# Altium PCB PE.PcbDoc
Units mm, origin at the board's own origin, x right, y up, seen from the top; angles counter-clockwise.
Board outline 60.83 x 52.32 mm, 2 copper layers (Top Layer, Bottom Layer); 18 components, 14 nets, 52 pads, 0 vias.
Unrouted connection lines stored in the file: 1.
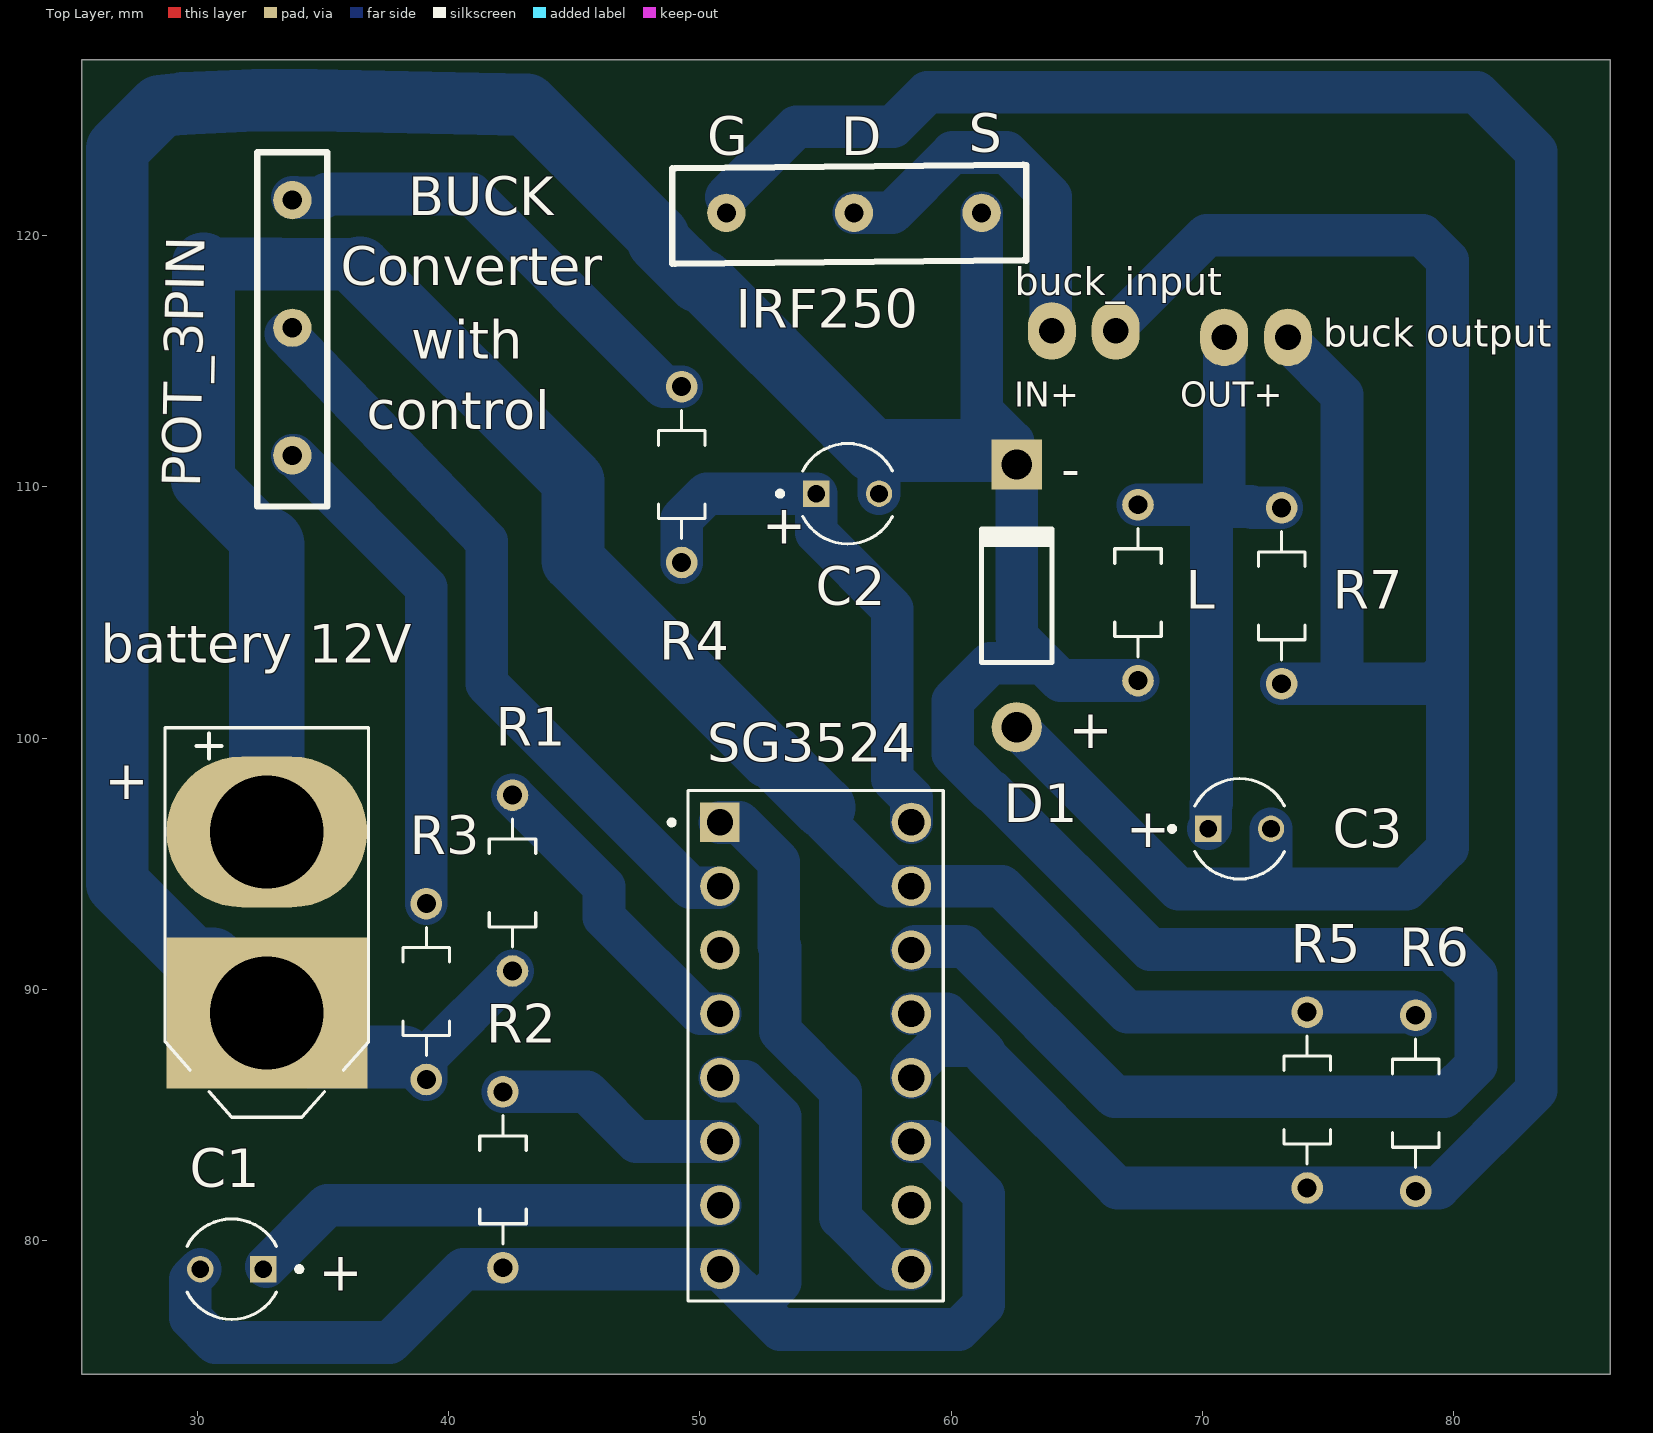
[diagram p0: Top Layer view]
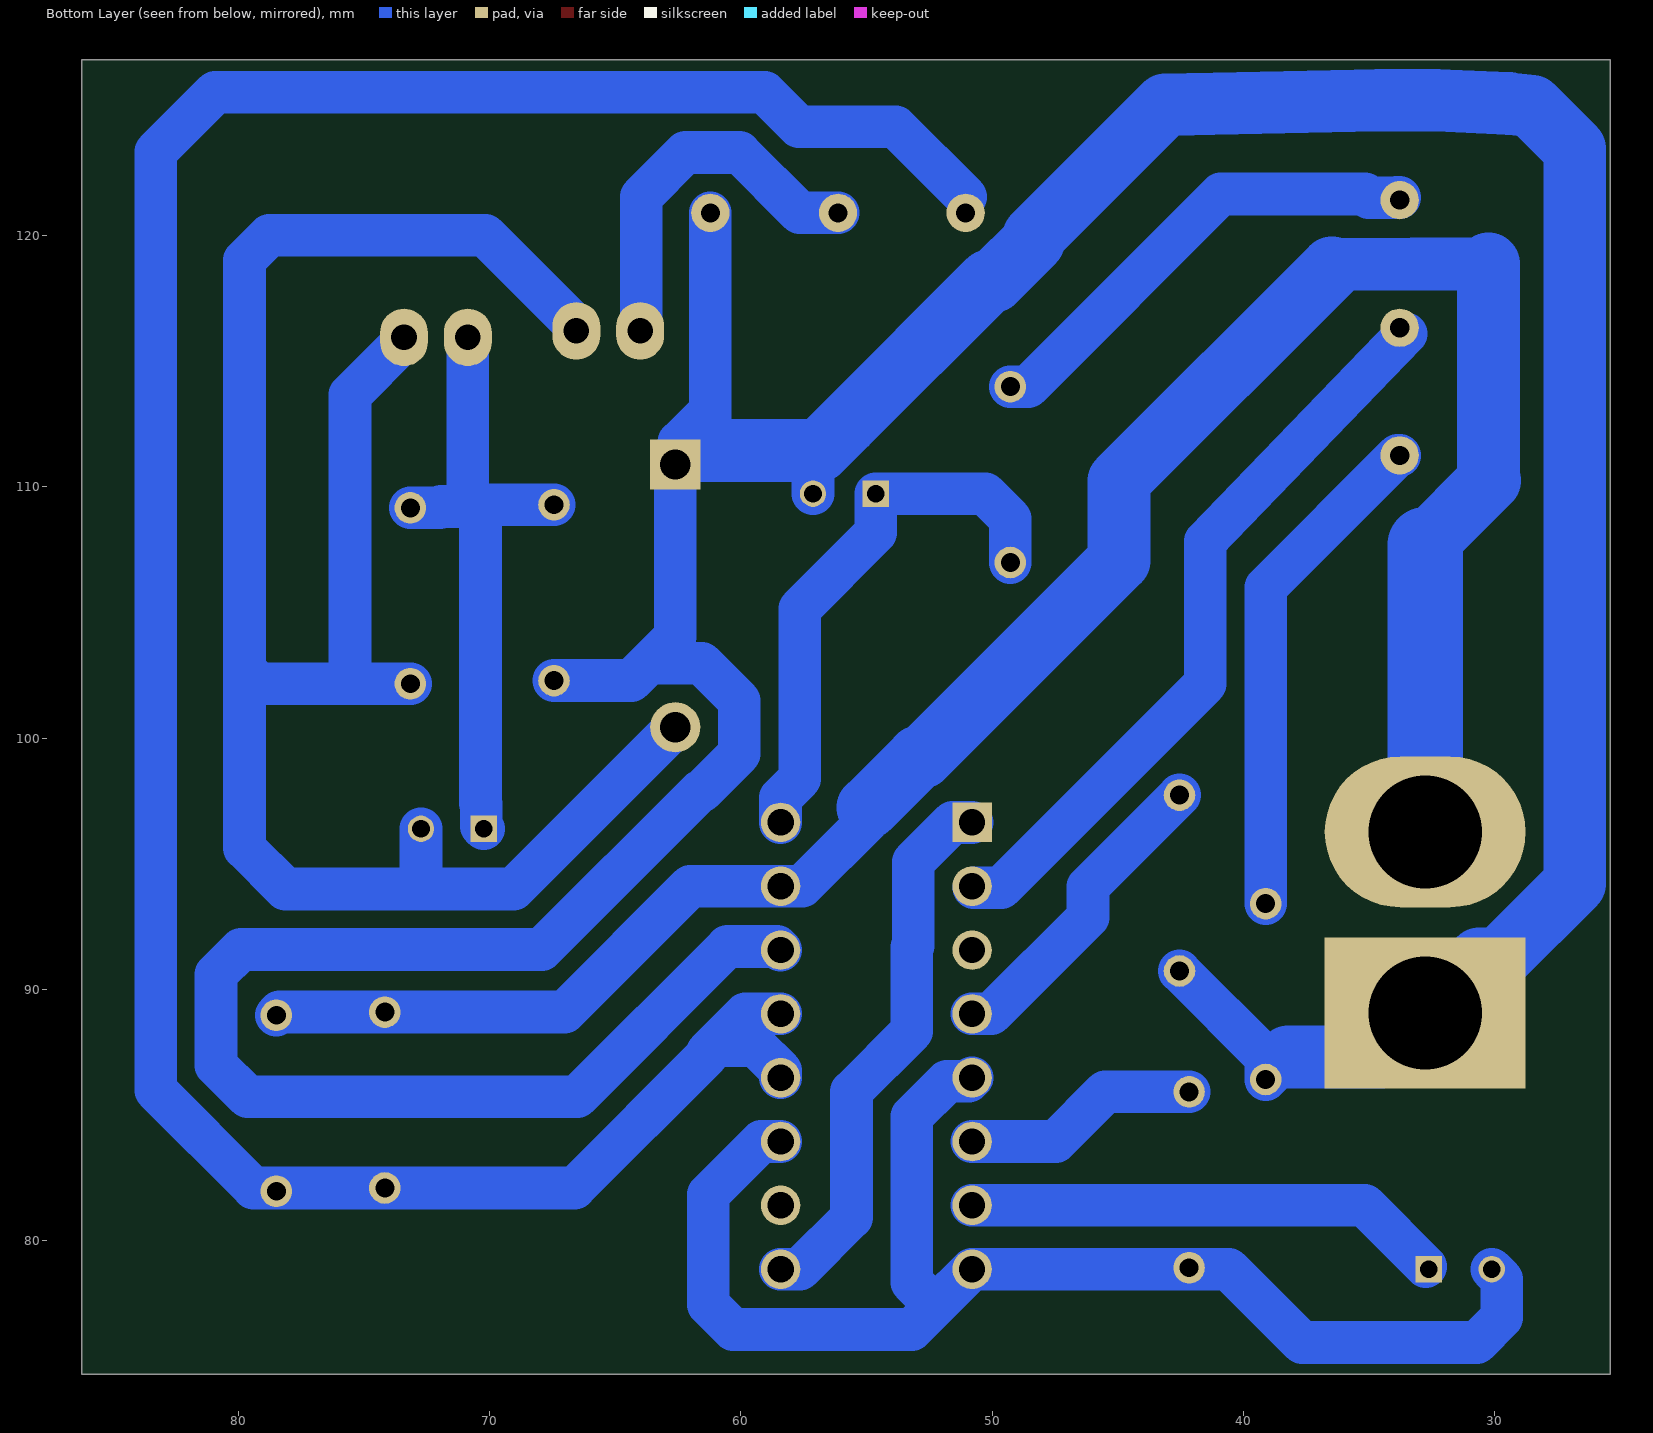
[diagram p1: Bottom Layer view, seen from below]
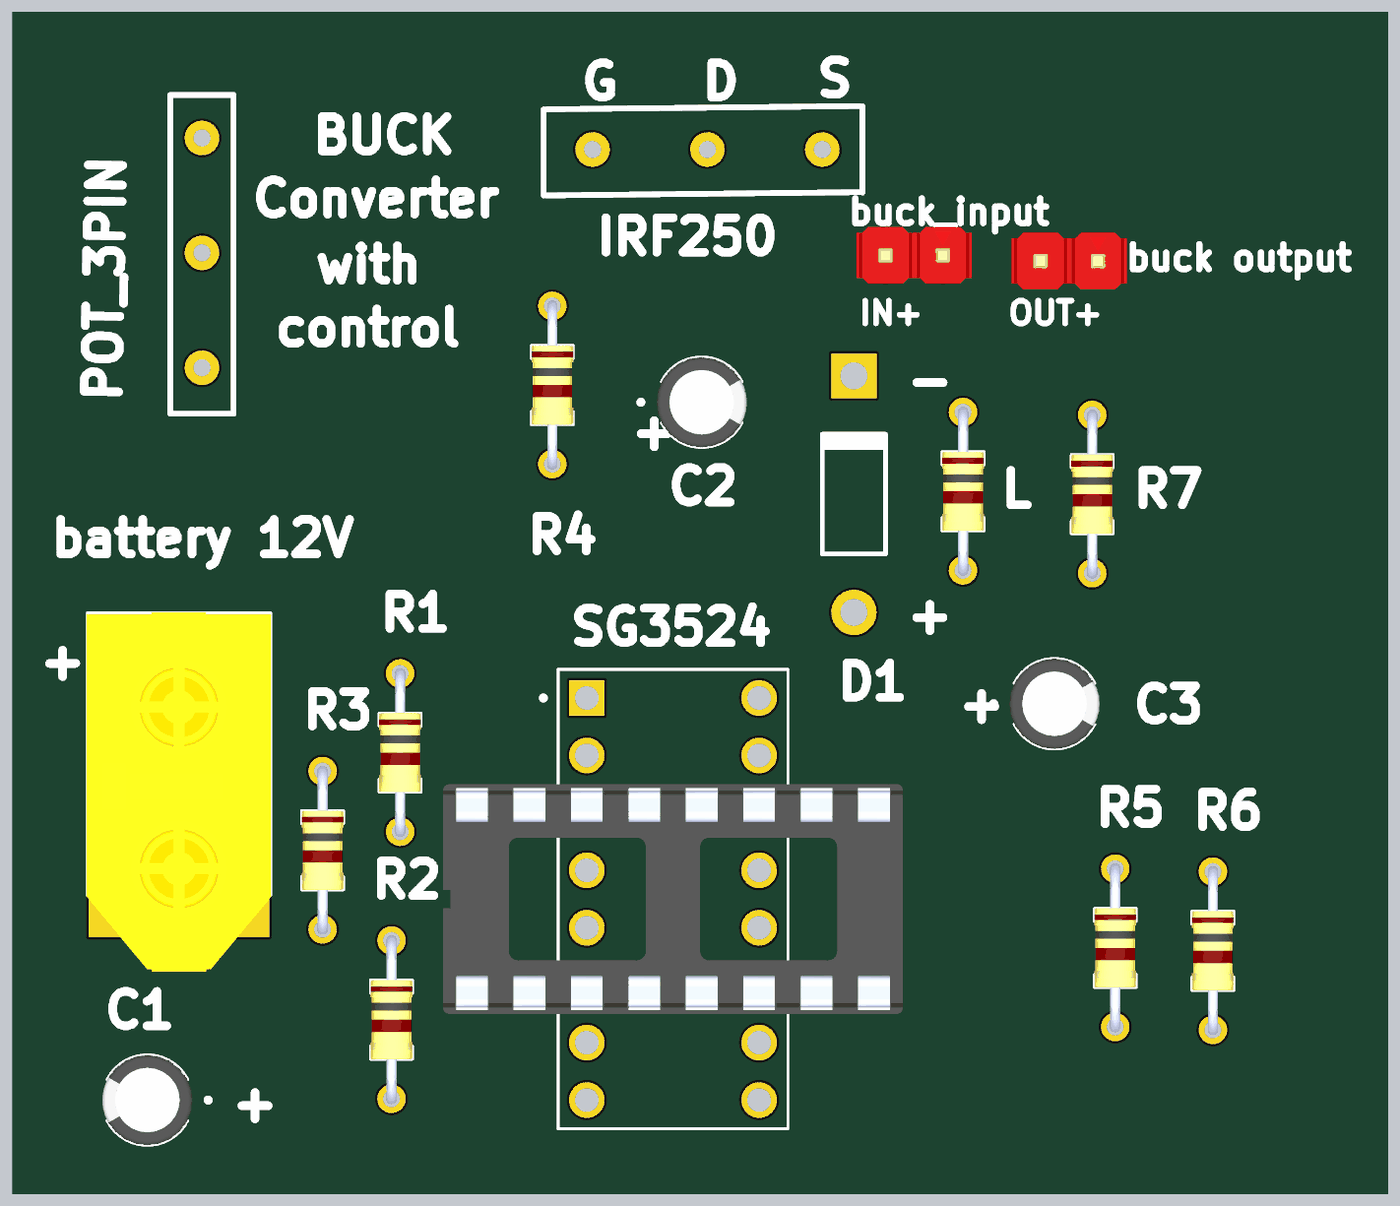
[diagram p2: 3D render of the assembled board from above, using the file's embedded part models]

## Layer stack, top to bottom
Top Solder: solder mask 0.0102, Solder Resist, Dk 3.5
Top Layer: signal copper 0.0356
Dielectric 1: dielectric 0.32, FR-4, Dk 4.8
Bottom Layer: signal copper 0.0356
Bottom Solder: solder mask 0.0102, Solder Resist, Dk 3.5

## Board outline
25.4,74.676 86.233,74.676 86.233,127 25.4,127

## Design rules (kind name [scope] priority, off if disabled: settings)
Clearance [All] p1: gap=0.9 ignorepadtopadclearanceinfootprint=TRUE except(0.7: Arc-Arc Arc-Track Arc-SMDPad Arc-THPad Arc-Via Track-Track Track-SMDPad Track-THPad Track-Via SMDPad-SMDPad SMDPad-THPad SMDPad-Via THPad-THPad THPad-Via Via-Via)
PolygonConnect [All] p1: connectstyle=Relief reliefconductorwidth=0.254 reliefentries=4 polygonreliefangle="90 Angle" airgapwidth=0.254
RoomDefinition PE [InComponentClass('PE')] p1: confinementstyle=ConfineIn formatcopy=TRUE lockcomponents=FALSE outline 0,25.693 186.964,25.693 186.964,163.576 0,163.576
RoutingVias [All] p1: holewidth=0.711 width=1.27 viastyle="Through Hole" minholewidth=0.711 minwidth=1.27 maxholewidth=0.711 maxwidth=1.27
SolderMaskExpansion [All] p1: expansion=0.102 istentingtop=FALSE
Width [All] p1: maxlimit=3 minlimit=1.5 preferedwidth=1.7 toplayer_maxwidth=1.7 bottomlayer_minwidth=1.7 minimp=50.000000 maximp=50.000000 favimp=50.000000
30 further rules are at their usual default settings.

## Components (designator, comment, footprint, x,y, rotation, side; value= is the part's Value field where it differs from the comment)
"battery 12V" "HEADER, 2 PINS" "XT60 MALE" 32.766,89.066 r90 top (schematic designator "Control_circuit battery input 12V")
"buck output" "2PIN" pin2 73.406,115.951 r90 top
buck_input "2PIN" pin2 66.548,116.205 r90 top
C1 "0.1uF cap" "4.7UF CAP" 31.369,78.867 r180 top
C2 "0.1uF cap" "4.7UF CAP" 55.88,109.728 r0 top
C3 "47uF cap" "4.7UF CAP" 71.481,96.393 r0 top
D1 "Diode 1N4934" DO-41 62.611,105.664 r90 top
IRF250 "Component_1" mosfetIRF250 51.054,120.904 r0 top (schematic designator MOSFERIRF250)
L "INDUCTOR" RESAD700W45L350D185 67.437,105.791 r90 top
POT_3PIN "POT_3PIN" pot_3pin 33.782,111.252 r90 top
R1 "1K" RESAD700W45L350D185 42.545,94.234 r90 top
R2 "2K" RESAD700W45L350D185 42.164,82.423 r90 top
R3 "4.7K" RESAD700W45L350D185 39.116,89.916 r90 top
R4 "4.7K" RESAD700W45L350D185 49.276,110.49 r90 top
R5 "6.8K" RESAD700W45L350D185 74.168,85.598 r90 top
R6 "6.8K" RESAD700W45L350D185 78.486,85.471 r90 top
R7 "220" RESAD700W45L350D185 73.152,105.664 r90 top
SG3524 "IC_BASE16PIN" AMPHENOL_DILB16P-223TLF 54.61,87.757 r0 top

## Footprints (in the part's own frame and the unit in brackets; to place one, negate y for a bottom-side part, rotate by r counter-clockwise, add the part's x,y. Pads: shape width x height; smd on the part's side, far side on the other; paste and mask are expansions set on the pad)
"4.7UF CAP" [mm]
  round 1.05 hole 0.7: N(1.25,0)
  rect 1.05x1.05 hole 0.7: P(-1.25,0)
  silkscreen extent -2.79,-2 1.78,2, body extent -2,-2 2,2, height 7
AMPHENOL_DILB16P-223TLF [mm]
  rect 1.575x1.575 hole 1.05: 01(-3.81,8.89)
  round 1.575 hole 1.05: 02(-3.81,6.35) 03(-3.81,3.81) 04(-3.81,1.27) 05(-3.81,-1.27) 06(-3.81,-3.81) 07(-3.81,-6.35) 08(-3.81,-8.89) 09(3.81,-8.89) 10(3.81,-6.35) 11(3.81,-3.81) 12(3.81,-1.27) 13(3.81,1.27) 14(3.81,3.81) 15(3.81,6.35) 16(3.81,8.89)
  silkscreen extent -5.83,-10.16 5.08,10.16, body extent -10.16,-5.08 10.16,5.08, height 5.25
DO-41 [mm] "Diode, Axial; Body 5.2 x 2.7 mm (LxDia. max), Lead Dia. 0.86 mm (max)"
  round 2 hole 1.2: 1(-5.23,0)
  rect 2x2 hole 1.2: 2(5.23,0)
  silkscreen extent -2.65,-1.41 2.75,1.4
mosfetIRF250 [mil]
  round 60 hole 30: 1(0,0) 2(200,0) 3(400,0)
  silkscreen extent -85,-80 470,76
pin2 [mil]
  oval 90x75 hole 40: 1(0,100) 2(0,0)
  body extent -48,-50 50,150, height 337
pot_3pin [mil]
  round 60 hole 30: 1(0,0) 2(200,0) 3(400,0)
  silkscreen extent -80,-55 475,55
RESAD700W45L350D185 [mm]
  round 1.258 hole 0.75: 1(-3.5,0) 2(3.5,0)
  silkscreen extent -2.55,-0.92 2.55,0.92, body extent -3.72,-0.92 3.72,0.92, height 1.85
"XT60 MALE" [mm]
  rect 6x8 hole 4.5: 1(0,0)
  oval 6x8 hole 4.5: 2(7.2,0)
  silkscreen extent -4.15,-4.05 11.35,4.05, body extent -4.52,-4.08 11.38,4.07, height 16.5

## Part data
"battery 12V": library part "XT60 MALE", "CONNECTOR"
C1 C2 C3: library part "4.7uF cap", "CAP ALUM 4.7UF 20% 50V RADIAL", Package="RADIAL-2 Panasonic", Availability="In Stock", Check_prices=https://www.snapeda.com/parts/ECE-A1HKA4R7I/Panasonic/view-part/2342017/?ref=eda, MF=Panasonic, MP=ECE-A1HKA4R7I, Price=None, Purchase-URL=https://pricing.snapeda.com/search/part/ECE-A1HKA4R7I/?ref=eda, SnapEDA_Link=https://www.snapeda.com/parts/ECE-A1HKA4R7I/Panasonic/view-part/2342017/?ref=snap
D1: "1 Amp Fast Recovery Rectifier", Code_JEDEC=DO-204-AL, ComponentLink1Description="Manufacturer Link", ComponentLink1URL=http://www.fairchildsemi.com/, ComponentLink2Description=Datasheet, ComponentLink2URL=http://www.fairchildsemi.com/ds/1N%2F1N4934.pdf, DatasheetVersion=1999, LatestRevisionDate=17-Jul-2002, LatestRevisionNote="Re-released for DXP Platform.", PackageDescription="Diode, Axial; Body 5.2 x 2.7 mm (LxDia. max), Lead Dia. 0.86 mm (max)", PackageReference=DO-41, PackageVersion=Aug-1999, Published=8-Jun-2000, Publisher="Altium Limited"
L R1 R2 R3 R4 R5 R6 R7: library part 3-1623927-1, "1 MOhms Â±5% 0.25W, 1/4W Through Hole Resistor Axial - Carbon Film", Package=None, Availability="In Stock", Check_prices=https://www.snapeda.com/parts/3-1623927-1/TE+Connectivity/view-part/?ref=eda, MF="TE Connectivity", MP=3-1623927-1, Price=None, SnapEDA_Link=https://www.snapeda.com/parts/3-1623927-1/TE+Connectivity/view-part/?ref=snap
SG3524: "DIP Socket, Stamped and Formed", Package=None, Availability="In Stock", Check_prices=https://www.snapeda.com/parts/DILB16P-223TLF/Amphenol+FCI/view-part/?ref=eda, MF="Amphenol ICC (FCI)", MP=DILB16P-223TLF, Price=None, SnapEDA_Link=https://www.snapeda.com/parts/DILB16P-223TLF/Amphenol+FCI/view-part/?ref=snap

## Nets (pads, with @x,y where several pads share a name; then routed paths per layer and width w, separated by ;. In a path a pad name is that pad's centre, name@x,y a point inside that pad or via, vN(x,y) a via of type N, cw(c..) or ccw(c..) an arc to the next point about the centre after c; other vN are vias at no path point)
"16th pin": C2.P R4.1 SG3524.16 | length 22.2
  Bottom Layer w1.7: R4.1 49.276,108.732 50.272,109.728 C2.P 54.63,108.184 57.661,105.153 57.661,98.384 58.42,97.625 SG3524.16
buck_input: buck_input.1 IRF250.2 | length 14.9
  Bottom Layer w1.7: IRF250.2 57.654,120.904 60.054,123.304 62.208,123.304 63.969,121.543 63.969,116.244 buck_input.1
buck_output: "buck output.1" C3.P L.2 R7.2 | length 25.4
  Bottom Layer w1.7: L.2 70.358,109.291 70.358,109.216 ; C3.P 70.331,96.493 70.331,97.387 70.358,97.414 70.358,109.216 ; 70.866,109.216 70.866,115.951 ; R7.2 71.986,109.164 71.934,109.216 70.358,109.216
"control ": IRF250.1 R5.1 R6.1 SG3524.12 SG3524.13 | length 105.1
  Bottom Layer w1.7: IRF250.1@51.054,121.539 53.848,124.333 57.688,124.333 59.059,125.704 80.919,125.704 83.286,123.337 83.286,85.988 79.396,82.098 78.486,82.098 R5.1 66.619,82.098 61.341,87.376 61.341,87.503 61.087,87.757 ; SG3524.12 58.42,86.761 59.416,87.757 61.087,87.757 ; SG3524.13 59.817,89.027 61.087,87.757
NetC1_P: C1.P SG3524.07 | length 19.1
  Bottom Layer w1.7: C1.P@32.748,78.976 35.179,81.407 SG3524.07
NetPOT_3PIN_1: POT_3PIN.1 R3.2 | length 20.1
  Bottom Layer w1.7: POT_3PIN.1 33.86,111.252 39.116,105.996 R3.2
NetPOT_3PIN_2: POT_3PIN.2 SG3524.02 | length 29.7
  Bottom Layer w1.7: POT_3PIN.2@33.532,116.091 41.516,107.836 41.516,102.164 49.635,94.045 SG3524.02@50.738,94.045
NetPOT_3PIN_3: POT_3PIN.3 R4.2 | length 18.7
  Bottom Layer w1.7: POT_3PIN.3@33.793,121.515 33.888,121.513 33.908,121.512 34.412,121.501 35.01,121.504 35.162,121.656 40.904,121.656 48.57,113.99 R4.2
NetR1_2: R1.2 SG3524.04 | length 12.6
  Bottom Layer w1.7: R1.2 46.188,94.091 46.188,92.873 50.034,89.027 SG3524.04
NetR2_2: R2.2 SG3524.06 | length 9.5
  Bottom Layer w1.7: R2.2 45.494,85.923 47.47,83.947 SG3524.06
NetSG3524_01: SG3524.01 SG3524.09 | length 21.8
  Bottom Layer w1.7: SG3524.01 51.566,96.647 53.138,95.075 53.138,91.736 53.2,91.674 53.2,88.335 55.6,85.935 55.6,80.921 57.654,78.867 SG3524.09
ref1: "buck output.2" buck_input.2 C3.N D1.1 R7.1 | length 83.1
  Bottom Layer w1.7: D1.1 69.052,93.993 72.517,93.993 ; buck_input.2 66.548,116.395 70.168,120.015 78.76,120.015 79.756,119.019 79.756,102.743 ; C3.N 72.731,94.207 72.517,93.993 ; R7.1 75.552,102.164 ; 73.406,115.816 75.552,113.67 75.552,102.164 ; 72.517,93.993 78.118,93.993 79.756,95.631 79.756,102.743 ; 75.552,102.164 79.177,102.164 79.756,102.743
ref2: "battery 12V.1" C1.N C2.N D1.2 IRF250.3 L.1 R1.1 R2.1 R3.1 SG3524.05 SG3524.08 SG3524.11 SG3524.14 | length 234
  Bottom Layer w1.7: C1.N 29.718,78.466 29.718,76.942 30.714,75.946 37.663,75.946 40.584,78.867 SG3524.08 52.261,77.406 ; 30.616,91.216 32.766,89.066 34.519,87.313 ; 38.219,87.313 R3.1 39.116,87.305 R1.1 ; SG3524.05 50.94,86.347 51.794,86.347 53.2,84.941 53.2,78.346 52.261,77.406 ; C2.N 57.13,110.851 57.173,110.894 ; SG3524.11 59.186,83.947 61.296,81.837 61.296,77.463 60.3,76.467 53.2,76.467 52.261,77.406 ; SG3524.14 58.56,91.707 60.531,91.707 66.513,85.725 79.629,85.725 80.886,86.982 80.886,90.597 79.89,91.593 67.919,91.593 61.628,97.884 61.555,97.884 60.061,99.378 60.061,101.49 61.555,102.984 63.667,102.984 ; IRF250.3 61.214,112.291 D1.2@62.461,111.044 ; 61.468,112.776 62.461,111.783 D1.2@62.461,111.044 ; L.1 64.36,102.291 63.667,102.984 ; D1.2@62.461,111.044 D1.2 62.611,104.04 63.667,102.984
  Bottom Layer w2.5: 30.616,91.216 29.816,91.216 26.816,94.216 26.816,123.445 28.515,125.144 29.435,125.255 32.313,125.389 34.632,125.389 42.107,125.229 43.111,125.207 43.821,124.497 48.342,119.976 48.342,119.781 49.931,118.192 50.126,118.192 55.79,112.528 56.866,111.452 D1.2@61.742,111.452 ; 34.519,87.313 38.219,87.313
VCC_12V: "battery 12V.2" R5.2 R6.2 SG3524.15 | length 86.4
  Bottom Layer w1.7: 36.322,118.856 36.472,118.722 ; 54.938,97.235 54.938,96.735 57.566,94.107 SG3524.15 62.011,94.107 67.02,89.098 R5.2 78.359,89.098 R6.2
  Bottom Layer w2: 30.001,110.744 30.001,110.715 30.089,110.627 ; 30.089,110.577 30.089,110.627 ; 30.251,110.627 30.089,110.627
  Bottom Layer w2.1: 30.251,118.872 33.221,118.872 36.322,118.856
  Bottom Layer w2.5: 30.206,110.256 32.766,107.696 ; 30.251,110.627 30.251,118.872 ; 36.472,118.722 44.958,110.236 44.958,107.061 52.774,99.245 52.928,99.245 54.938,97.235
  Bottom Layer w3: 32.766,96.266 32.766,107.696
pads on no net: SG3524.03 SG3524.10

## Silkscreen, mask and mechanical layers (free items; w line width, h text height)
Top Overlay:
  text "BUCK" at 38.386,120.809 h1.52
  text "Converter" at 35.719,118.015 h1.52
  text "with" at 38.513,115.094 h1.52
  text "IN+" at 62.516,113.189 h1
  text "OUT+" at 69.12,113.189 h1
  text "control" at 36.735,112.3 h1.52
  text "-" at 64.373,109.966 h1.52
  text "+" at 52.483,107.728 h1.52
  text "+" at 64.675,99.6 h1.52
  text "+" at 26.321,97.568 h1.52
  text "+" at 66.961,95.663 h1.52
  text "+" at 34.83,78.01 h1.52

## Text inside footprints (layer, text, board x,y; h text height)
IRF250: Top Overlay "G" at 50.292,123.19 h1.52; Top Overlay "D" at 55.626,123.19 h1.52; Top Overlay "S" at 60.706,123.317 h1.52